# Altium PCB FPC_to_wires.PcbDoc
Units mm, origin at the board's own origin, x right, y up, seen from the top; angles counter-clockwise.
Board outline 15 x 15.6 mm, 2 copper layers (Top Layer, Bottom Layer); 21 components, 20 nets, 42 pads, 20 vias.
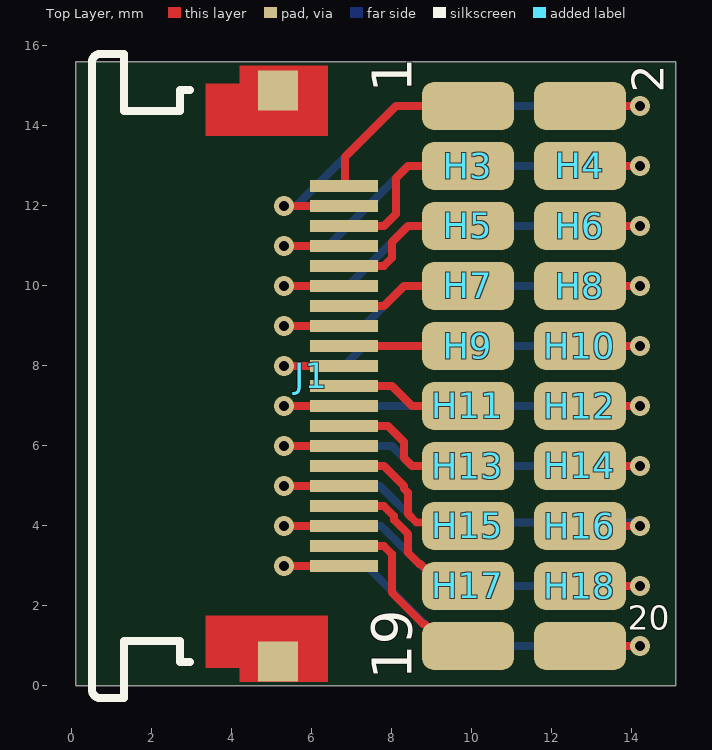
[diagram p0: Top Layer view]
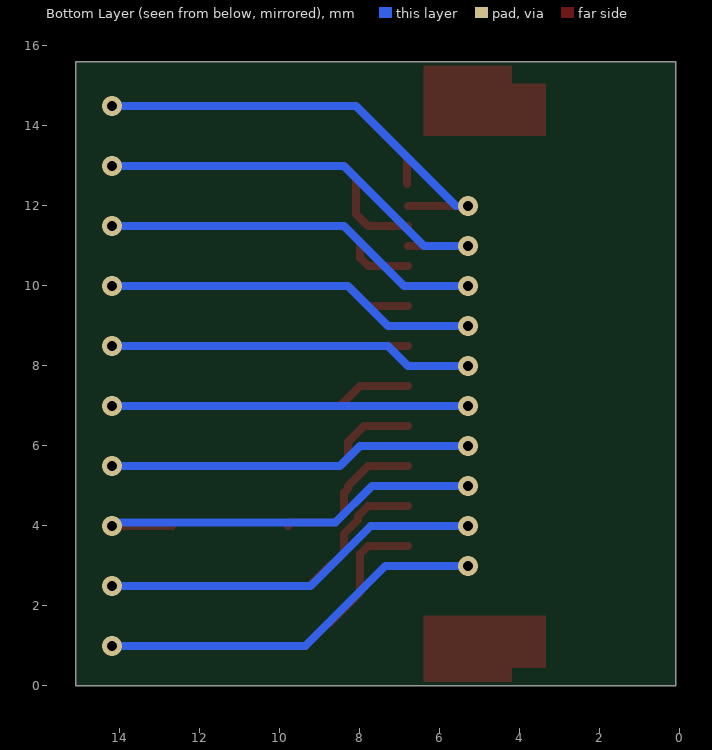
[diagram p1: Bottom Layer view, seen from below]

## Layer stack, top to bottom
Top Solder: solder mask 0.0102, Solder Resist, Dk 3.5
Top Layer: signal copper 0.0356
Dielectric 1: dielectric 0.32, FR-4, Dk 4.8
Bottom Layer: signal copper 0.0356
Bottom Solder: solder mask 0.0102, Solder Resist, Dk 3.5

## Board outline
0.1,15.6 15.1,15.6 15.1,0 0.1,0

## Design rules (kind name [scope] priority, off if disabled: settings)
Clearance [All] p1: gap=0.25 ignorepadtopadclearanceinfootprint=FALSE except(0: Arc-Hole Track-Hole SMDPad-Hole THPad-Hole Via-Hole Fill-Hole Poly-Hole Region-Hole Text-Hole; 0.15: Arc-Arc Arc-Track Track-Track; 0.2: SMDPad-SMDPad)
ComponentClearance [All] p1 off: gap=0.254 collisioncheckmode=3 verticalgap=0.254 showdistances=FALSE
HoleSize [All] p1: absolutevalues=TRUE maxlimit=6.3 minlimit=0.2 maxpercent=80.000 minpercent=20.000
MinimumAnnularRing [All] p1: minimumring=0.13
MinimumSolderMaskSliver [All] p1 off: minsoldermaskwidth=0.254
PolygonConnect [All] p1: connectstyle=Relief reliefconductorwidth=0.254 reliefentries=4 polygonreliefangle="90 Angle" airgapwidth=0.254
RoutingVias [All] p1: holewidth=0.25 width=0.5 viastyle="Through Hole" minholewidth=0.2 minwidth=0.2 maxholewidth=6.3 maxwidth=6.7
SilkToSilkClearance [All] p1: silktosilkclearance=0.15
SilkToSolderMaskClearance [IsPad] p1: minsilkscreentomaskgap=0.15 clearancetoexposedcopper=TRUE
SolderMaskExpansion [All] p1: expansion=0.102 istentingtop=FALSE useseparateexpansions=TRUE expansionbottom=0.102 istentingbottom=TRUE
Width [All] p1: maxlimit=0.5 minlimit=0.15 preferedwidth=0.3 minimp=50.000000 maximp=50.000000 favimp=50.000000
25 further rules are at their usual default settings.

## Components (designator, comment, footprint, x,y, rotation, side; value= is the part's Value field where it differs from the comment)
1 "PAD" PAD#1 9.8,14.5 r0 top (schematic designator H1)
2 "PAD" PAD#2 12.7,14.5 r0 top (schematic designator H2)
19 "PAD" PAD#3 9.8,1 r180 top (schematic designator H19)
20 "PAD" PAD#2 12.7,1 r180 top (schematic designator H20)
H3 "PAD" PAD#1 9.8,13 r0 top
H4 "PAD" PAD#2 12.7,13 r0 top
H5 "PAD" PAD#1 9.8,11.5 r0 top
H6 "PAD" PAD#2 12.7,11.5 r0 top
H7 "PAD" PAD#1 9.8,10 r0 top
H8 "PAD" PAD#2 12.7,10 r0 top
H9 "PAD" PAD#1 9.8,8.5 r0 top
H10 "PAD" PAD#2 12.7,8.5 r180 top
H11 "PAD" PAD#3 9.8,7 r180 top
H12 "PAD" PAD#2 12.7,7 r180 top
H13 "PAD" PAD#3 9.8,5.5 r180 top
H14 "PAD" PAD#2 12.7,5.5 r180 top
H15 "PAD" PAD#3 9.8,4 r180 top
H16 "PAD" PAD#2 12.7,4 r0 top
H17 "PAD" PAD#3 9.8,2.5 r180 top
H18 "PAD" PAD#2 12.7,2.5 r180 top
J1 "52745-2097" MOLX-52745-2097 5.977,7.75 r270 top

## Footprints (in the part's own frame and the unit in brackets; to place one, negate y for a bottom-side part, rotate by r counter-clockwise, add the part's x,y. Pads: shape width x height; smd on the part's side, far side on the other; paste and mask are expansions set on the pad)
MOLX-52745-2097 [mm] "FPC Connector, 20-Leads, Right Angle, Pitch 0.5 mm, Mated Height 2.0 mm, SMT"
  rect 0.3x1.7 smd: 1(-4.75,0.823) 2(-4.25,0.823) 3(-3.75,0.823) 4(-3.25,0.823) 5(-2.75,0.823) 6(-2.25,0.823) 7(-1.75,0.823) 8(-1.25,0.823) 9(-0.75,0.823) 10(-0.25,0.823) 11(0.25,0.823) 12(0.75,0.823) 13(1.25,0.823) 14(1.75,0.823) 15(2.25,0.823) 16(2.75,0.823) 17(3.25,0.823) 18(3.75,0.823) 19(4.25,0.823) 20(4.75,0.823)
  rect 1x1 smd: MP1(-7.134,-0.823) MP2(7.135,-0.823)
  Top Layer region: 6,0.424 7.65,0.424 7.65,-1.777 7.3,-1.777 7.3,-2.626 6,-2.626
  Top Layer region: -7.75,0.424 -6,0.424 -6,-2.626 -7.3,-2.626 -7.3,-1.777 -7.75,-1.777
  silkscreen extent -8.05,-5.48 8.05,-3.03, body extent -8.05,-5.48 8.05,0.92, height 2.01
PAD#1 [mm]
  rrect50% 2.3x1.2 smd: 1(0.1,0)
PAD#2 [mm]
  rrect50% 2.3x1.2 smd: 1(0,0)
PAD#3 [mm]
  rrect50% 2.3x1.2 smd: 1(-0.1,0)

## Part data
J1: "0.5 mm Pitch Easy-On(TM) Type FPC Connector, 2.0 mm Mated Height, Right Angle, ZIF, SMT, Top Contact, 20 Circuits, -20 to 85 degC, ELV and RoHS Compliant, Tape and Reel", Current (Max per Contact)=0.5A, Manufacturer=Molex, Voltage (Max)=50V, Circuits (Loaded)=20, ComponentLink1Description="Manufacturer URL", ComponentLink1URL=http://www.molex.com/molex/index.jsp, ComponentLink2Description=Datasheet, ComponentLink2URL=http://www.molex.com/webdocs/datasheets/pdf/en-us/0527452097_FFC_FPC_CONNECTORS.pdf, ComponentLink3Description="Package Specification", ComponentLink3URL=http://www.molex.com/pdm_docs/sd/527452097_sd.pdf, Contact Position=Top, Durability (mating cycles max)=20, Entry Angle="90degrees Angle", Mated Height=2.00mm, Material - Metal="Phosphor Bronze", Material - Plating Mating=Gold, Material - Plating Termination=Gold, Mounting Technology="Surface Mount", Number of Rows=1, Orientation="Right Angle", PackageDescription="20-Lead FPC Connector, Pitch 0.5 mm", PackageReference=52745-2097, PackageVersion="Rev. C, 07/2010", Packing="Tape and Reel", PartNumber=52745-2097, PCB Locator=No, PCB Retention=Yes, Pitch - Mating Interface=0.50mm, Polarized to PCB=Yes, RoHS=TRUE, Stackable=No

## Via types
v1: diameter 0.5, hole 0.25, Top Layer to Bottom Layer, tented bottom, 20 vias

## Nets (pads, with @x,y where several pads share a name; then routed paths per layer and width w, separated by ;. In a path a pad name is that pad's centre, name@x,y a point inside that pad or via, vN(x,y) a via of type N, cw(c..) or ccw(c..) an arc to the next point about the centre after c; other vN are vias at no path point)
NetH1_1: 1.1 J1.1 | length 3.9
  Top Layer w0.2: J1.1@6.823,12.55 6.823,13.223 8.1,14.5 1.1@9.5,14.5
NetH2_1: 2.1 J1.2 | length 12.9
  Top Layer w0.2: v1(5.3,12) J1.2 ; 2.1 v1(14.2,14.5)
  Bottom Layer w0.2: v1(5.3,12) 5.6,12 8.1,14.5 v1(14.2,14.5)
NetH3_1: H3.1 J1.3 | length 4.1
  Top Layer w0.2: J1.3 7.8,11.5 8.1,11.8 8.1,12.7 8.4,13 H3.1@9.8,13
NetH4_1: H4.1 J1.4 | length 12.7
  Top Layer w0.2: v1(5.3,11) J1.4 ; H4.1 v1(14.2,13)
  Bottom Layer w0.2: v1(5.3,11) 6.4,11 8.4,13 v1(14.2,13)
NetH5_1: H5.1 J1.5 | length 3.6
  Top Layer w0.2: J1.5 7.795,10.5 8,10.705 8,11.1 8.4,11.5 H5.1@9.8,11.5
NetH6_1: H6.1 J1.6 | length 12.5
  Top Layer w0.2: v1(5.3,10) J1.6 ; H6.1 v1(14.2,11.5)
  Bottom Layer w0.2: v1(5.3,10) 6.9,10 8.4,11.5 v1(14.2,11.5)
NetH7_1: H7.1 J1.7 | length 3.2
  Top Layer w0.2: J1.7 7.8,9.5 8.3,10 H7.1@9.8,10
NetH8_1: H8.1 J1.8 | length 12.3
  Top Layer w0.2: v1(5.3,9) J1.8 ; H8.1 v1(14.2,10)
  Bottom Layer w0.2: v1(5.3,9) 7.3,9 8.3,10 v1(14.2,10)
NetH9_1: H9.1 J1.9 | length 3
  Top Layer w0.2: J1.9 H9.1@9.8,8.5
NetH10_1: H10.1 J1.10 | length 12.1
  Top Layer w0.2: v1(5.3,8) J1.10 ; H10.1 v1(14.2,8.5)
  Bottom Layer w0.2: v1(5.3,8) 6.801,8 7.3,8.5 v1(14.2,8.5)
NetH11_1: H11.1 J1.11 | length 3.2
  Top Layer w0.2: J1.11 8,7.5 8.5,7 H11.1@9.8,7
NetH12_1: H12.1 J1.12 | length 11.9
  Top Layer w0.2: v1(5.3,7) J1.12 ; H12.1 v1(14.2,7)
  Bottom Layer w0.2: v1(5.3,7) v1(14.2,7)
NetH13_1: H13.1 J1.13 | length 3.6
  Top Layer w0.2: J1.13 7.9,6.5 8.3,6.1 8.3,5.7 8.5,5.5 H13.1@9.8,5.5
NetH14_1: H14.1 J1.14 | length 12.1
  Top Layer w0.2: v1(5.3,6) J1.14 ; H14.1 v1(14.2,5.5)
  Bottom Layer w0.2: v1(5.3,6) 8,6 8.5,5.5 v1(14.2,5.5)
NetH15_1: H15.1 J1.15 | length 4
  Top Layer w0.2: J1.15 7.8,5.5 8.3,5 8.3,4.931 8.4,4.831 8.4,4.3 8.609,4.091 9.709,4.091 H15.1@9.8,4
NetH16_1: H16.1 J1.16 | length 12.3
  Top Layer w0.2: v1(5.3,5) J1.16 ; H16.1 v1(14.2,4)
  Bottom Layer w0.2: v1(5.3,5) 7.7,5 8.609,4.091 14.027,4.091 14.119,4 v1(14.2,4)
NetH17_1: H17.1 J1.17 | length 4.2
  Top Layer w0.2: J1.17 7.795,4.5 8.05,4.245 8.05,4.155 8.4,3.805 8.4,3.331 8.681,3.05 8.717,3.05 9.267,2.5 H17.1@9.8,2.5
NetH18_1: H18.1 J1.18 | length 12.5
  Top Layer w0.2: v1(5.3,4) J1.18 ; H18.1 v1(14.2,2.5)
  Bottom Layer w0.2: v1(5.3,4) 7.731,4 9.231,2.5 v1(14.2,2.5)
NetH19_1: 19.1 J1.19 | length 4.7
  Top Layer w0.2: J1.19 7.8,3.5 7.8,3.495 8,3.295 8,2.331 8.781,1.55 8.817,1.55 9.367,1 19.1
NetH20_1: 20.1 J1.20 | length 12.7
  Top Layer w0.2: v1(5.3,3) J1.20 ; 20.1 v1(14.2,1)
  Bottom Layer w0.2: v1(5.3,3) 7.367,3 9.367,1 v1(14.2,1)
pads on no net: J1.MP1 J1.MP2

## Silkscreen, mask and mechanical layers (free items; w line width, h text height)
Mechanical 1:
  the board outline again, w0.1